# Altium PCB MainBoard.PcbDoc
Units mil, origin at the board's own origin, x right, y up, seen from the top; angles counter-clockwise.
Board outline 6790 x 4640 mil, 2 copper layers (Top Layer, Bottom Layer); 62 components, 122 nets, 447 pads, 24 vias.
Unrouted connection lines stored in the file: 85.
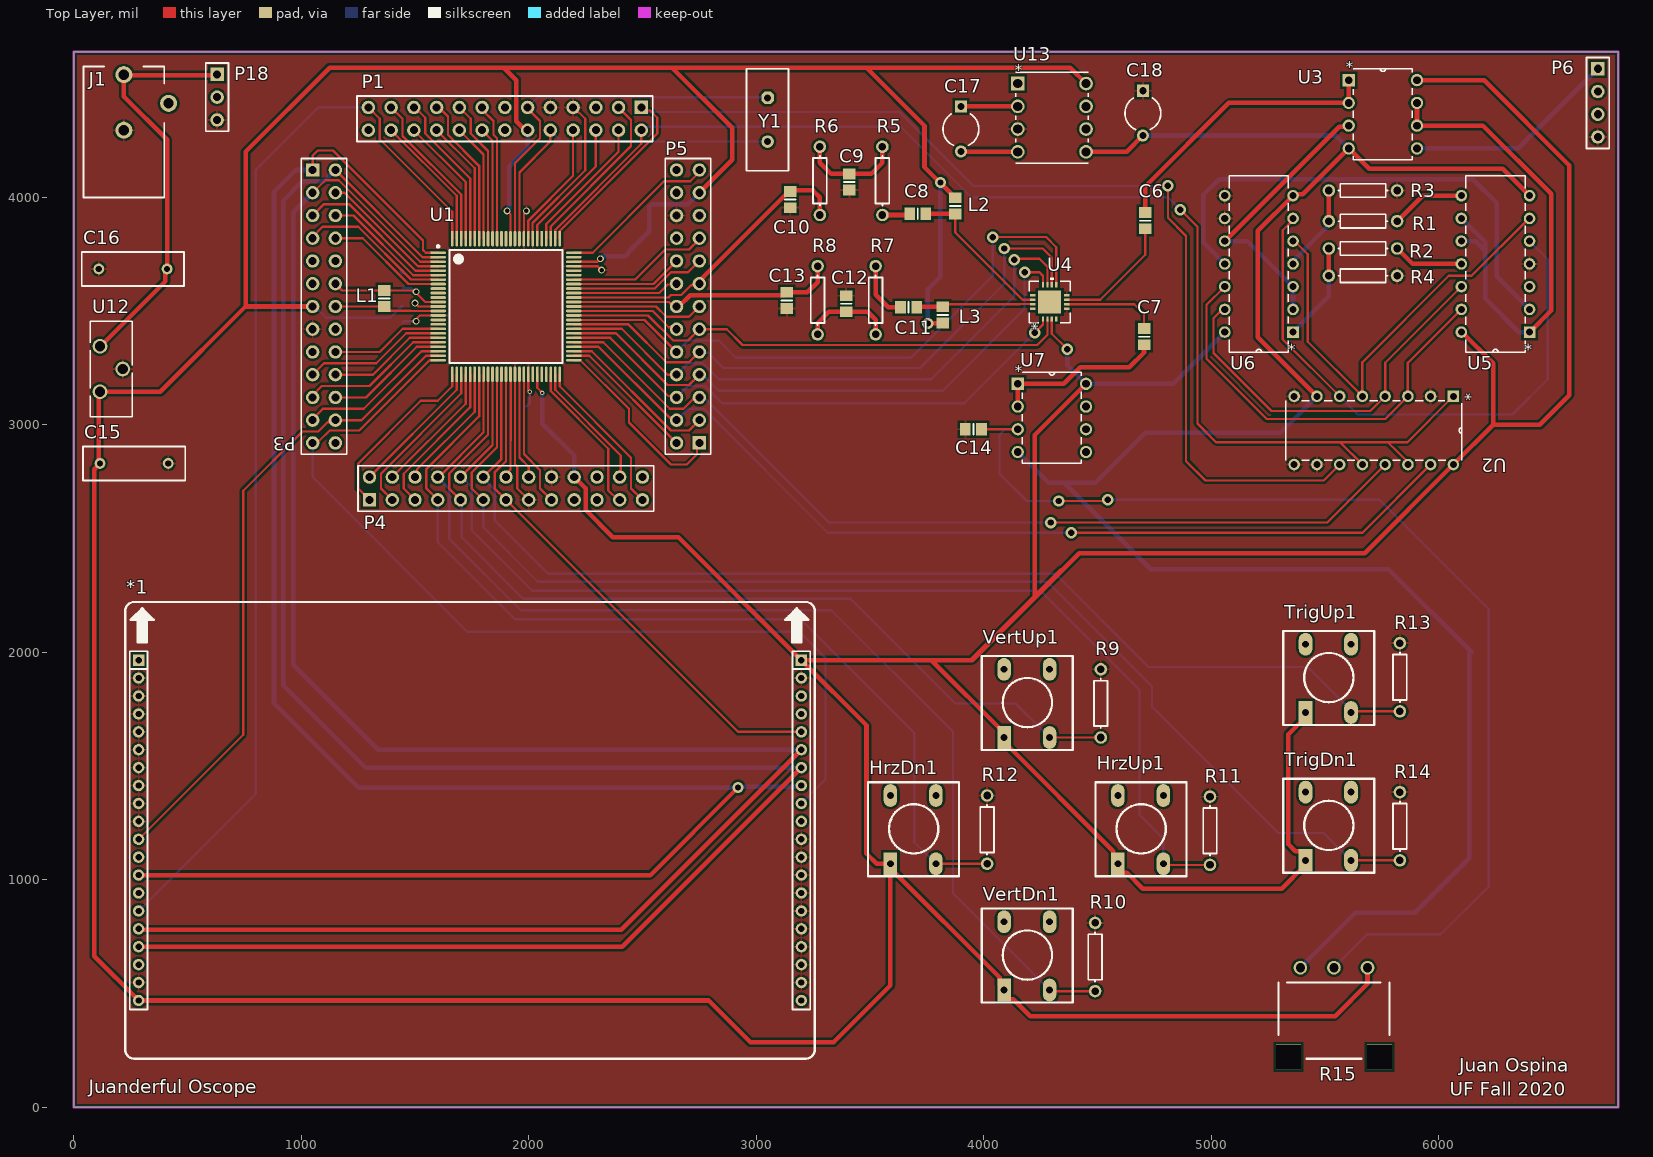
[diagram p0: Top Layer view]
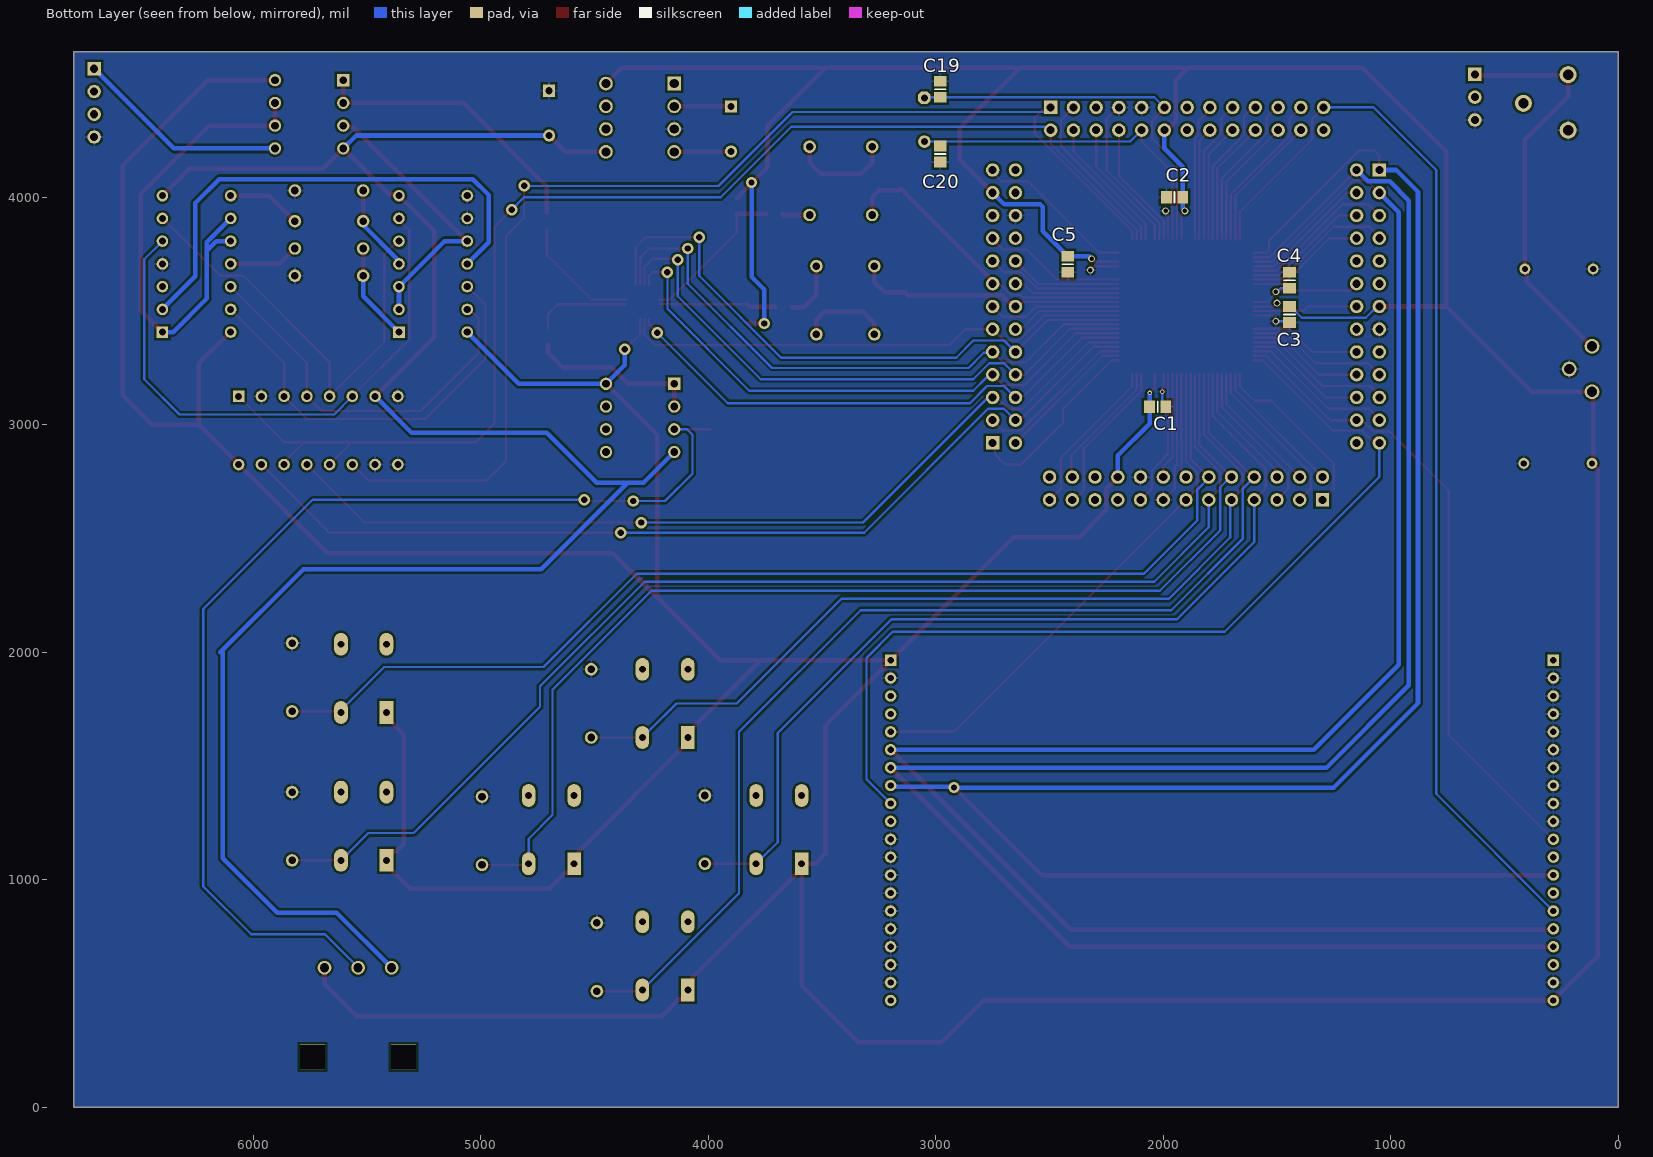
[diagram p1: Bottom Layer view, seen from below]

## Layer stack, top to bottom
Top Solder: solder mask 0.4, Solder Resist, Dk 3.5
Top Layer: signal copper 1.4
Dielectric 1: dielectric 12.6, FR-4, Dk 4.8
Bottom Layer: signal copper 1.4
Bottom Solder: solder mask 0.4, Solder Resist, Dk 3.5

## Board outline
0,0 6790,0 6790,4640 0,4640

## Design rules (kind name [scope] priority, off if disabled: settings)
Clearance Clearance_1 [InNetClass('ICNets') vs InNetClass('ICNets')] p1: gap=10 ignorepadtopadclearanceinfootprint=TRUE except(0: Arc-Hole Track-Hole SMDPad-Hole THPad-Hole Via-Hole Fill-Hole Poly-Hole Region-Hole Text-Hole; 1: Arc-Arc Arc-Track Arc-SMDPad Track-Track Track-SMDPad)
Clearance [All] p2: gap=10 ignorepadtopadclearanceinfootprint=TRUE except(0: Arc-Hole Track-Hole SMDPad-Hole THPad-Hole Via-Hole Fill-Hole Poly-Hole Region-Hole Text-Hole)
ComponentClearance [All] p1: gap=0 collisioncheckmode=3 verticalgap=10 showdistances=FALSE
PolygonConnect [All] p1: connectstyle=Relief reliefconductorwidth=10 reliefentries=4 polygonreliefangle="90 Angle" airgapwidth=10
RoomDefinition MSP432 [InComponentClass('MSP432')] p1: confinementstyle=ConfineIn formatcopy=TRUE lockcomponents=FALSE outline 775,2415 3215,2415 3215,4635 775,4635
RoutingVias RoutingVias_1 [InNetClass('ICVia')] p1: holewidth=28 width=50 viastyle="Through Hole" minholewidth=10 minwidth=20 maxholewidth=28 maxwidth=50
RoutingVias [All] p2: holewidth=28 width=50 viastyle="Through Hole" minholewidth=28 minwidth=50 maxholewidth=28 maxwidth=50
SolderMaskExpansion [All] p1: expansion=4 istentingtop=FALSE
Width Width_2 [InNetClass('SensitiveLines')] p1: maxlimit=20 minlimit=10 preferedwidth=20 minimp=50.000000 maximp=50.000000 favimp=50.000000
Width Width_1 [InNetClass('PowerNEts')] p2: maxlimit=20 minlimit=10 preferedwidth=20 minimp=50.000000 maximp=50.000000 favimp=50.000000
Width [All] p3: maxlimit=10 minlimit=10 preferedwidth=10
29 further rules are at their usual default settings.

## Classes and differential pairs
net class ICVia: AVCC1 AVSS1 VCORE
net class ICNets: 1:1_Atten_En 2:1_Atten_En 5:1_Atten_En ADC_Vref+ ADC_Vref- Atten_Latch AVCC1 AVSS1 DCOR HorzZoomDn HorzZoomUp LCD_CS LCD_RS LCD_SCK LCD_SDI LCD_SDO NetC6_2 NetC7_2 P1.0 P1.1 P1.2 P1.3 P1.4 P1.5 P1.6 P1.7 P2.0 P2.1 P2.2 P2.3 P2.4 P2.5 P2.6 P2.7 P3.1 P3.2 P3.4 P3.5 P3.6 P3.7 P4.0 P4.1 P4.2 P4.3 P4.4 P4.5 P4.6 P4.7 P5.2 P5.3 P5.4 P5.5 P5.6 P5.7 P6.4 P6.5 P6.6 P6.7 P7.0 P7.1 P7.2 P7.3 P7.4 P7.5 P7.6 P7.7 P8.0 P8.1 P8.2 P8.3 P8.4 P8.5 P8.6 P8.7 P9.0 P9.1 P9.2 P9.3 P9.4 P9.5 P9.6 P9.7 P10.5 PJ.0 PJ.1 PJ.2 PJ.3 PJ.4 PJ.5 RST_NMI_N SWCLKTCK SWDIOTMS VCORE VGA_Out+ VGA_Out- VSW
net class SensitiveLines: "1:1 Atten In" "2:1 Atten In" "2:1 Atten Out" "5:1 Atten In" "5:1 Atten Out" ADC_Vref+ ADC_Vref- "Atten In" "Atten Out" LCD_SCK LCD_SD0 LCD_SDI LCD_SDO NetC8_1 NetC9_2 NetC11_1 NetC12_2 Oscilloscope_In VGA_in+ VGA_in- VGA_Out+ VGA_Out-
net class PowerNEts: -3.3V AVCC1 NetC17_1 NetC17_2 Power_In
component class PowerCircuit: C15 C16 C17 C18 J1 P18 U12 U13
component class InterfaceBoard: *1 HrzDn1 HrzUp1 R9 R10 R11 R12 R13 R14 R15 TrigDn1 TrigUp1 VertDn1 VertUp1
component class MSP432: C1 C2 C3 C4 C5 C19 C20 L1 P1 P3 P4 P5 U1 Y1
component class FrontEndCircuit: C6 C7 C8 C9 C10 C11 C12 C13 C14 L2 L3 P6 R1 R2 R3 R4 R5 R6 R7 R8 U2 U3 U4 U5 U6 U7

## Components (designator, comment, footprint, x,y, rotation, side; value= is the part's Value field where it differs from the comment)
*1 "LCD" "LCD Footprint" 1655,1275 r0 top
C1 "Cap" 6-0805_N 2024.57,3080 r180 bottom value=4.7uF
C2 "Cap" 6-0805_N 1950,4000 r0 bottom value=4.7uF
C3 "Cap" 6-0805_N 1445,3485 r270 bottom value=4.7uF
C4 "Cap" 6-0805_N 1445,3635.43 r90 bottom value=4.7uF
C5 "Cap" 6-0805_N 2420,3705.43 r270 bottom value=4.7uF
C6 "Cap" 6-0805_N 4710,3897.25 r270 top value=100pF
C7 "Cap" 6-0805_N 4705,3387.25 r90 top value=100pF
C8 "Cap" 6-0805_N 3710.43,3927.25 r0 top value=100pF
C9 "Cap" 6-0805_N 3410,4067.25 r90 top value=100pF
C10 "Cap" 6-0805_N 3150,3990 r90 top value=100pF
C11 "Cap" 6-0805_N 3670,3517.25 r0 top value=100pF
C12 "Cap" 6-0805_N 3395,3531.82 r270 top value=100pF
C13 "Cap" 6-0805_N 3135,3546.82 r90 top value=100pF
C14 "Cap" 6-0805_N 3955,2980 r0 top value=100pF
C15 "Cap" RAD-0.3 265,2830 r0 top value=100pF
C16 "Cap" RAD-0.3 260,3685 r180 top value=100pF
C17 "Cap2" CAPR5-4X5 3900,4300 r270 top value=100pF
C18 "Cap2" CAPR5-4X5 4700,4370 r270 top value=100pF
C19 "Cap" 6-0805_N 2980,4475 r270 bottom value=4.7uF
C20 "Cap" 6-0805_N 2980,4190.43 r270 bottom value=4.7uF
HrzDn1 "SW-PB" "SW PB" 3590,1070 r90 top
HrzUp1 "SW-PB" "SW PB" 4590,1070 r90 top
J1 "PWR2.5" "Power 2.5 fixed" 45,3999.72 r90 top
L1 "Inductor" 6-0805_N 1365,3555 r270 top value=4.7uH
L2 "Inductor" 6-0805_N 3875,3962.25 r90 top value=10mH
L3 "Inductor" 6-0805_N 3820,3482.88 r270 top value=10mH
P1 "Header 13X2" HDR2X13 2495,4395 r180 top
P3 "Header 13X2" HDR2X13 1050,4120 r270 top
P4 "Header 13X2" HDR2X13 1300,2670 r0 top
P5 "Header 13X2" HDR2X13 2750,2920 r90 top
P6 "Header 4" HDR1X4 6700,4565 r270 top
P18 "Header 3" HDR1X3 630,4540 r270 top
R1 "Res1" AXIAL-0.3 5667.75,3895 r180 top value=20K
R2 "Res1" AXIAL-0.3 5667.75,3775 r180 top value=10K
R3 "Res1" AXIAL-0.3 5667.75,4030 r180 top value=5K
R4 "Res1" AXIAL-0.3 5667.75,3655 r180 top value=10K
R5 "Res1" AXIAL-0.3 3555,4072.25 r90 top value=1K
R6 "Res1" AXIAL-0.3 3280,4072.25 r270 top value=1K
R7 "Res1" AXIAL-0.3 3525,3547.25 r270 top value=1K
R8 "Res1" AXIAL-0.3 3270,3547.25 r90 top value=1K
R9 "Res1" AXIAL-0.3 4515,1775 r90 top value=1K
R10 "Res1" AXIAL-0.3 4490,660 r90 top value=1K
R11 "Res1" AXIAL-0.3 4995,1215 r90 top value=1K
R12 "Res1" AXIAL-0.3 4015,1220 r90 top value=1K
R13 "Res1" AXIAL-0.3 5830,1890 r90 top value=1K
R14 "Res1" AXIAL-0.3 5830,1235 r90 top value=1K
R15 "RPot_3" BigPot 5540,613 r180 top value=10K
TrigDn1 "SW-PB" "SW PB" 5415,1085 r90 top
TrigUp1 "SW-PB" "SW PB" 5415,1735 r90 top
U1 "MSP432P401RIPZ" PZ0100A_N 1900,3520 r0 top value=Value
U2 "CD4054BE" N16 5365,2825 r270 top
U3 "LM358AP" P8 5905,4215 r0 top
U4 "LMH6515SQ/NOPB" SQA16A 4290,3540 r90 top
U5 "CD4066BE" N14 6100,4007.25 r180 top
U6 "CD4066BE" N14 5060,4007.25 r180 top
U7 "LM358AP" P8 4450,2880 r0 top
U12 "TLV2217-33KCSE3" KCS3 215,3345 r90 top
U13 "icl7660epa+" 21-0043D_8_MXM 4150,4500 r0 top
VertDn1 "SW-PB" "SW PB" 4090,515 r90 top
VertUp1 "SW-PB" "SW PB" 4090,1625 r90 top
Y1 "XTAL" HC-49U 3050,4341.06 r270 top

## Footprints (in the part's own frame and the unit in brackets; to place one, negate y for a bottom-side part, rotate by r counter-clockwise, add the part's x,y. Pads: shape width x height; smd on the part's side, far side on the other; paste and mask are expansions set on the pad)
6-0805_N [mm] "Chip Resistor, Body 2.0x1.2mm, IPC Medium Density"
  rect 1.2x1.4 smd: 1(-0.9,0) 2(0.9,0)
  silkscreen extent 0,-0.6 0,0.6, body extent -1.07,-0.7 1.07,0.7, height 0.7
21-0043D_8_MXM [mil]
  rect 60x60 hole 40 mask+0: 1(0,0)
  round 60 hole 40 mask+0: 2(0,-100) 3(0,-200) 4(0,-300) 5(300,-300) 6(300,-200) 7(300,-100) 8(300,0)
  silkscreen extent -10,-350 310,50, body extent 0,0 10,10, height 10
AXIAL-0.3 [mm] "Axial Device, Thru-Hole; 2 Leads; 0.3 in Pin Spacing"
  round 1.4 hole 0.85: 1(-3.81,0) 2(3.81,0)
  silkscreen extent -2.77,-0.76 2.77,0.76
BigPot [mil]
  round 60 hole 40: 1(147.5,0) 2(0,0) 3(-147.5,0)
  rect 110x110 hole 106 square: ""(-200,393) ""(200,393)
  silkscreen extent -244,65 244,400
CAPR5-4X5 [mm] "Capacitor; 2 Leads"
  rect 1.35x1.35 hole 0.8: 1(-2.5,0)
  round 1.35 hole 0.8: 2(2.5,0)
  silkscreen extent -1.69,-2 1.82,2
HC-49U [mm]
  oct 1.4x1.4 hole 0.8: 1(-2.44,0)
  round 1.4 hole 0.8: 2(2.44,0)
  silkscreen extent -5.7,-2.35 5.7,2.35
HDR1X3 [mm] "Connector; Header; 3 Position"
  rect 1.5x1.5 hole 0.9: 1(0,0)
  round 1.5 hole 0.9: 2(2.54,0) 3(5.08,0)
  silkscreen extent -1.27,-1.27 6.35,1.27
HDR1X4 [mm] "Connector; Header; 4 Position"
  rect 1.5x1.5 hole 0.9: 1(0,0)
  round 1.5 hole 0.9: 2(2.54,0) 3(5.08,0) 4(7.62,0)
  silkscreen extent -1.27,-1.27 8.89,1.27
HDR2X13 [mm] "Connector; Header; 13x2 Position"
  rect 1.5x1.5 hole 0.9: 1(0,0)
  round 1.5 hole 0.9: 2(0,2.54) 3(2.54,0) 4(2.54,2.54) 5(5.08,0) 6(5.08,2.54) 7(7.62,0) 8(7.62,2.54) 9(10.16,0) 10(10.16,2.54) 11(12.7,0) 12(12.7,2.54) 13(15.24,0) 14(15.24,2.54) 15(17.78,0) 16(17.78,2.54) 17(20.32,0) 18(20.32,2.54) 19(22.86,0) 20(22.86,2.54) 21(25.4,0) 22(25.4,2.54) 23(27.94,0) 24(27.94,2.54) 25(30.48,0) 26(30.48,2.54)
  silkscreen extent -1.27,-1.27 31.75,3.81
KCS3 [mil]
  round 65 hole 45: 1(-200,100) 2(-100,0) 3(0,100)
  silkscreen extent -310,-43 110,142, body extent 0,0 10,10, height 10
"LCD Footprint" [mm]
  rect 1.27x1.27 hole 0.7: 1(-34.798,17.526) 21(39.202,17.526)
  round 1.27 hole 0.7: 2(-34.798,15.526) 3(-34.798,13.526) 4(-34.798,11.526) 5(-34.798,9.526) 6(-34.798,7.526) 7(-34.798,5.526) 8(-34.798,3.526) 9(-34.798,1.526) 10(-34.798,-0.474) 11(-34.798,-2.474) 12(-34.798,-4.474) 13(-34.798,-6.474) 14(-34.798,-8.474) 15(-34.798,-10.474) 16(-34.798,-12.474) 17(-34.798,-14.474) 18(-34.798,-16.474) 19(-34.798,-18.474) 20(-34.798,-20.474) 22(39.202,15.526) 23(39.202,13.526) 24(39.202,11.526) 25(39.202,9.526) 26(39.202,7.526) 27(39.202,5.526) 28(39.202,3.526) 29(39.202,1.526) 30(39.202,-0.474) 31(39.202,-2.474) 32(39.202,-4.474) 33(39.202,-6.474) 34(39.202,-8.474) 35(39.202,-10.474) 36(39.202,-12.474) 37(39.202,-14.474) 38(39.202,-16.474) 39(39.202,-18.474) 40(39.202,-20.474)
  silkscreen extent -36.3,-26.97 40.7,24.03
N14 [mil]
  rect 51x51 hole 31: 1(-300,600)
  round 51 hole 31: 2(-300,500) 3(-300,400) 4(-300,300) 5(-300,200) 6(-300,100) 7(-300,0) 8(0,0) 9(0,100) 10(0,200) 11(0,300) 12(0,400) 13(0,500) 14(0,600)
  silkscreen extent -280,-88 -20,688, body extent 0,0 10,10, height 10
N16 [mil]
  rect 51x51 hole 31: 1(-300,700)
  round 51 hole 31: 2(-300,600) 3(-300,500) 4(-300,400) 5(-300,300) 6(-300,200) 7(-300,100) 8(-300,0) 9(0,0) 10(0,100) 11(0,200) 12(0,300) 13(0,400) 14(0,500) 15(0,600) 16(0,700)
  silkscreen extent -280,-38 -20,738, body extent 0,0 10,10, height 10
P8 [mil]
  rect 54x54 hole 34: 1(-300,300)
  round 54 hole 34: 2(-300,200) 3(-300,100) 4(-300,0) 5(0,0) 6(0,100) 7(0,200) 8(0,300)
  silkscreen extent -280,-50 -20,350, body extent 0,0 10,10, height 10
"Power 2.5 fixed" [mm]
  round 1.905 hole 1.143: 1(13.7,-4.445) 2(7.5,-4.445) 3(10.5,-9.445)
  silkscreen extent 0,-8.95 14.6,0.06
PZ0100A_N [mm]
  oval 1.75x0.3 smd paste+0 mask+0.051: 1(-7.575,6) 2(-7.575,5.5) 3(-7.575,5) 4(-7.575,4.5) 5(-7.575,4) 6(-7.575,3.5) 7(-7.575,3) 8(-7.575,2.5) 9(-7.575,2) 10(-7.575,1.5) 11(-7.575,1) 12(-7.575,0.5) 13(-7.575,0) 14(-7.575,-0.5) 15(-7.575,-1) 16(-7.575,-1.5) 17(-7.575,-2) 18(-7.575,-2.5) 19(-7.575,-3) 20(-7.575,-3.5) 21(-7.575,-4) 22(-7.575,-4.5) 23(-7.575,-5) 24(-7.575,-5.5) 25(-7.575,-6) 51(7.575,-6) 52(7.575,-5.5) 53(7.575,-5) 54(7.575,-4.5) 55(7.575,-4) 56(7.575,-3.5) 57(7.575,-3) 58(7.575,-2.5) 59(7.575,-2) 60(7.575,-1.5) 61(7.575,-1) 62(7.575,-0.5) 63(7.575,0) 64(7.575,0.5) 65(7.575,1) 66(7.575,1.5) 67(7.575,2) 68(7.575,2.5) 69(7.575,3) 70(7.575,3.5) 71(7.575,4) 72(7.575,4.5) 73(7.575,5) 74(7.575,5.5) 75(7.575,6)
  oval 0.3x1.75 smd paste+0 mask+0.051: 26(-6,-7.575) 27(-5.5,-7.575) 28(-5,-7.575) 29(-4.5,-7.575) 30(-4,-7.575) 31(-3.5,-7.575) 32(-3,-7.575) 33(-2.5,-7.575) 34(-2,-7.575) 35(-1.5,-7.575) 36(-1,-7.575) 37(-0.5,-7.575) 38(0,-7.575) 39(0.5,-7.575) 40(1,-7.575) 41(1.5,-7.575) 42(2,-7.575) 43(2.5,-7.575) 44(3,-7.575) 45(3.5,-7.575) 46(4,-7.575) 47(4.5,-7.575) 48(5,-7.575) 49(5.5,-7.575) 50(6,-7.575) 76(6,7.575) 77(5.5,7.575) 78(5,7.575) 79(4.5,7.575) 80(4,7.575) 81(3.5,7.575) 82(3,7.575) 83(2.5,7.575) 84(2,7.575) 85(1.5,7.575) 86(1,7.575) 87(0.5,7.575) 88(0,7.575) 89(-0.5,7.575) 90(-1,7.575) 91(-1.5,7.575) 92(-2,7.575) 93(-2.5,7.575) 94(-3,7.575) 95(-3.5,7.575) 96(-4,7.575) 97(-4.5,7.575) 98(-5,7.575) 99(-5.5,7.575) 100(-6,7.575)
  silkscreen extent -7.7,-6.3 6.3,6.82, body extent 0,0 0.25,0.25, height 0.25
RAD-0.3 [mm] "Radial Cap, Thru-Hole; 2 Leads; 0.3 in Pin Spacing"
  round 1.2 hole 0.7: 1(-3.81,0) 2(3.81,0)
  silkscreen extent -5.71,-1.91 5.71,1.91
SQA16A [mil]
  rect 24x10 smd paste-5: 1(-75,29.53) 2(-75,9.84) 3(-75,-9.84) 4(-75,-29.53) 9(75,-29.53) 10(75,-9.84) 11(75,9.84) 12(75,29.53)
  rect 10x24 smd paste-5: 5(-29.53,-75) 6(-9.84,-75) 7(9.84,-75) 8(29.53,-75) 13(29.53,75) 14(9.84,75) 15(-9.84,75) 16(-29.53,75)
  rect 102x102 smd paste-51: 17(0,0)
  silkscreen extent -90,-90 107,90, body extent 0,0 10,10, height 10
"SW PB" [mil]
  rect 100x60 hole 30: 1(0,0)
  oval 100x60 hole 30: 2(0,-200) 3(300,-200) 4(300,0)
  silkscreen extent -55,-302 358,98

## Part data
C1 C2 C3 C4 C5 C6 C7 C8 C9 C10 C11 C12 C13 C14 C15 C16 C17 C18 C19 C20: "Capacitor", Publisher="Altium Limited"
  C1 C2 C3 C4 C5 C6 C7 C8 C9 C10 C11 C12 C13 C14 C15 C16 C19 C20: LatestRevisionDate=17-Jul-2002, LatestRevisionNote="Re-released for DXP Platform.", PackageDescription="Radial Cap, Thru-Hole; 2 Leads; 0.3 in Pin Spacing", PackageReference=RAD-0.3, Published=8-Jun-2000
  C17 C18: PackageDescription="Capacitor; 2 Leads", PackageReference=CAPR5-4X5, Published=23-Sep-2002
HrzDn1 HrzUp1 TrigDn1 TrigUp1 VertDn1 VertUp1: "DIGIKEY SW400-ND", LatestRevisionDate=17-Jul-2002, LatestRevisionNote="Re-released for DXP Platform.", Published=24-Mar-1999, Publisher="Altium Limited"
J1: "Low Voltage Power Supply Connector", ComponentLink1Description="Manufacturer Link", ComponentLink1URL=http://domino.kycon.com/internet/Products.html, DatasheetDocument=09-May-2002, Published=17-Dec-2003, Publisher="Altium Limited"
P1 P3 P4 P5: "Header, 13-Pin, Dual row", LatestRevisionDate=17-Jul-2002, LatestRevisionNote="Re-released for DXP Platform.", Publisher="Altium Limited"
P6: "Header, 4-Pin", LatestRevisionDate=17-Jul-2002, LatestRevisionNote="Re-released for DXP Platform.", Publisher="Altium Limited"
P18: "Header, 3-Pin", LatestRevisionDate=17-Jul-2002, LatestRevisionNote="Re-released for DXP Platform.", Publisher="Altium Limited"
R1 R2 R3 R4 R5 R6 R7 R8 R9 R10 R11 R12 R13 R14: "Resistor", LatestRevisionDate=17-Jul-2002, LatestRevisionNote="Re-released for DXP Platform.", PackageDescription="Axial Device, Thru-Hole; 2 Leads; 0.3 in Pin Spacing", PackageReference=AXIAL-0.3, Published=8-Jun-2000, Publisher="Altium Limited"
R15: library part RPot, "Potentiometer", LatestRevisionDate=17-Jul-2002, LatestRevisionNote="Re-released for DXP Platform.", Published=8-Jun-2000, Publisher="Altium Limited", Set Position=0.5, Sim Note="Enter the Resistance value and the set point into parameter fields."
U1: "No Description Available", Manufacturer="Texas Instruments", PartNumber=XMS432P401RIPZR, CompType=IC, Copyright="Copyright (C) 2018 Accelerated Designs. All rights reserved", MountType=SMT, PackageReference=PZ0100A, PIN_COUNT=100, RefDes=RefDes, TYPE=DEV
U2: "CMOS 4-Segment Liquid-Crystal Display Driver", Manufacturer="Texas Instruments", PACKAGE_DESIGNATOR=N, Copyright="Copyright (C) 2018 Accelerated Designs. All rights reserved", Datasheet_URL=http://www.ti.com/lit/gpn/CD4054B, FAMILY_NAME="NON-INVERTING BUFFER/DRIVER", GENERIC_PART_NUMBER=CD4054B, INDUSTRY_STD_PKG_TYPE=PDIP, PIN_COUNT=16, RefDes=RefDes, TYPE=DEV
U3 U7: "Dual Operational Amplifier", Manufacturer="Texas Instruments", PACKAGE_DESIGNATOR=P, Copyright="Copyright (C) 2018 Accelerated Designs. All rights reserved", Datasheet_URL=http://www.ti.com/lit/gpn/LM358A, FAMILY_NAME="STANDARD LINEAR AMPLIFIER", GENERIC_PART_NUMBER=LM358A, INDUSTRY_STD_PKG_TYPE=PDIP, Manufacturer_Part_Number=LM358AP, PIN_COUNT=8, RefDes=RefDes, TYPE=DEV, Vendor="Texas Instruments"
U4 U13: "No Description Available", Copyright="Copyright (C) 2018 Accelerated Designs. All rights reserved", RefDes=RefDes, TYPE=DEV
  U13: Built_By=EMA_UL_Team, Manufacturer_Part_Number=icl7660epa+, SourceLibrary=Maxim_2014-06-20, Vendor="Maxim Integrated Products"
U5 U6: "CMOS Quad Bilateral Switch", Manufacturer="Texas Instruments", PACKAGE_DESIGNATOR=N, Copyright="Copyright (C) 2018 Accelerated Designs. All rights reserved", Datasheet_URL=http://www.ti.com/lit/gpn/CD4066B, FAMILY_NAME="ANALOG SWITCH/MULTIPLEXER (greater than 5V)", GENERIC_PART_NUMBER=CD4066B, INDUSTRY_STD_PKG_TYPE=PDIP, PIN_COUNT=14, RefDes=RefDes, TYPE=DEV
U12: "Single Output LDO, 500mA, Fixed(1.8V), Output Accuracy of 2%, Thermal Overload Protection", Manufacturer="Texas Instruments", PACKAGE_DESIGNATOR=KCS, Copyright="Copyright (C) 2018 Accelerated Designs. All rights reserved", Datasheet_URL=http://www.ti.com/lit/gpn/TLV2217-18, FAMILY_NAME="SINGLE CHANNEL LDO", GENERIC_PART_NUMBER=TLV2217-18, INDUSTRY_STD_PKG_TYPE=TO-220, Manufacturer_Part_Number=TLV2217-33KCSE3, PIN_COUNT=3, RefDes=RefDes, TYPE=DEV, Vendor="Texas Instruments"
Y1: "Crystal Oscillator", LatestRevisionDate=17-Jul-2002, LatestRevisionNote="Re-released for DXP Platform.", PackageDescription="Crystal, Thru-Hole; 2 Leads; Body 3.1 x 8.2 mm (Dia.xH)", PackageReference=R38, Published=8-Jun-2000, Publisher="Altium Limited"
L1 L2 L3: Code_IEC=1005, Code_JEITA=0402, LatestRevisionDate=29-May-2009, LatestRevisionNote="IPC-7351 Footprint Added.", PackageDescription="Chip Inductor", PackageReference=0402-A, Published=8-Jun-2000, Publisher="Altium Limited"

## Via types
v1: diameter 50, hole 28, Top Layer to Bottom Layer, 15 vias
v2: diameter 30, hole 20, Top Layer to Bottom Layer, 7 vias
v3: diameter 20, hole 10, Top Layer to Bottom Layer, 2 vias

## Nets (pads, with @x,y where several pads share a name; then routed paths per layer and width w, separated by ;. In a path a pad name is that pad's centre, name@x,y a point inside that pad or via, vN(x,y) a via of type N, cw(c..) or ccw(c..) an arc to the next point about the centre after c; other vN are vias at no path point)
"1:1 Atten In": U5.2 U6.11 | length 2232.4
  Bottom Layer w20: U6.11 4965,3802.25 4965,4010 5035,4080 6150,4080 6255,3975 6255,3652.25 U5.2
"1:1 Enable": U2.3 U5.13 U6.12 | length 1866.2
  Top Layer w10: U6.12 4980,3527.25 4980,3290 5245,3025 5765,3025 U2.3 5865,3272.25 U5.13
1:1_Atten_En: P5.4 U1.54 U2.15 | length 4280.4
  Top Layer w10: U1.54 2307.17,3342.83 2620.61,3029.39 2640.61,3029.39 P5.4 P5.4@2656.49,3026.49 ; v1(4385,2525) 5665,2525 U2.15
  Bottom Layer w10: P5.4 2700,3070 2770,3070 3315,2525 v1(4385,2525)
"2:1 Atten In": R2.1 U5.11 | length 310.3
  Top Layer w20: R2.1 5885.5,3707.25 U5.11
"2:1 Atten Out": R2.2 R4.2 U6.1 | length 433.1
  Top Layer w20: R4.2 R2.2
  Bottom Layer w20: U6.1 5517.75,3565 R4.2
"2:1 Enable": U2.4 U5.12 U6.13 | length 1728
  Top Layer w10: U6.13 5048.91,3507.25 5010,3468.34 5010,3315 5265,3060 5700,3060 U2.4 5765,3272.25 U5.12
2:1_Atten_En: P5.5 U1.55 U2.13 | length 4047.3
  Top Layer w10: U1.55 2327.48,3362.52 2620,3070 2680,3070 2720.61,3110.61 2740.61,3110.61 P5.5 P5.5@2753.67,3116.33 ; v1(4295,2570) 5510,2570 U2.13
  Bottom Layer w10: P5.5 2759.39,3110.61 2779.39,3110.61 3320,2570 v1(4295,2570)
"5:1 Atten In": R1.1 U5.8 | length 328.7
  Top Layer w20: R1.1 5930,4007.25 U5.8
"5:1 Atten Out": R1.2 R3.2 U6.4 | length 388.1
  Top Layer w20: R1.2 R3.2
  Bottom Layer w10: U6.4 5360,3718.34 5372.26,3730.61 5372.26,3732.26 ; R1.2@5509.12,3869.12 5509.12,3886.37 R1.2
  Bottom Layer w20: 5372.26,3732.26 R1.2@5509.12,3869.12
"5:1 Enable": U2.5 U5.6 U6.5 | length 1960
  Top Layer w10: U6.5 5367.75,3807.25 5425,3750 5425,3365 U2.5 5665,3275 6045,3655 6145,3655 6397.25,3907.25 U5.6
5:1_Atten_En: P1.1 U1.76 U2.11 | length 5238.3
  Top Layer w10: U1.76 2136.57,3818.57 2136.57,3851.57 2565,4280 2565,4350 2533.67,4381.33 2508.67,4381.33 P1.1 ; v1(4810,4050) 4810,3910 4890,3830 4890,2840 4975,2755 5495,2755 U2.11
  Bottom Layer w10: P1.1 2515,4375 3630,4375 3955,4050 v1(4810,4050)
+5: 
-3.3V: C18.2 R15.1 U2.7 U3.4 U5.7 U6.7 U7.4 U13.5 | length 8948.4
  Top Layer w20: U13.5 4628.43,4200 C18.2 ; U2.7 5205,3385 5205,3852.25 U6.7 5365.93,4013.18 5403.18,4013.18 U3.4 5695,4125 6282.25,4125 U5.7
  Bottom Layer w20: U7.4 4285,2745 4355,2745 ; C18.2 5548.43,4271.57 U3.4 ; R15.1 5634.5,855 5895,855 6135,1095 6135,2000 ; U2.7 5305,2965 4710,2965 4490,2745 4355,2745 ; 6145,2000 5780,2365 4735,2365 4355,2745
-5: 
ADC_Vref+: C10.2 P5.15 R6.2 U1.65 | length 1381.8
  Top Layer w10: U1.65 2614.37,3559.37 2625,3570 2670,3570 2713.51,3613.51 2743.51,3613.51 P5.15
  Top Layer w20: P5.15 2750,3630.57 2766.18,3646.75 2766.18,3648 3137.44,4019.26 3137.44,4023.19 3151.06,4036.82 3155,4036.82 3161.82,4030 3250,4030 3280,4000 R6.2
ADC_Vref-: C13.2 P5.14 R8.2 U1.64 | length 1194.3
  Top Layer w10: U1.64 2617.04,3539.69 2636.73,3520 P5.14
  Top Layer w20: P5.14 2660,3520 2710,3570 3122.75,3570 C13.2 3225,3582.25 3270,3627.25 R8.2
"Atten In": U3.6 U3.7 U5.1 U5.9 U5.10 | length 2235.8
  Top Layer w20: U3.7 U3.6 6195,4315 6495,4015 6495,3502.25 U5.1
  Bottom Layer w20: U5.10 6162.75,3807.25 6205,3765 ; U5.9 6205,3802.25 6205,3765 ; U5.1 6352.75,3407.25 6205,3555 6205,3765
"Atten Out": U3.3 U6.2 U6.3 U6.10 | length 1238.2
  Top Layer w10: U3.3@5600.25,4310.25 U3.3
  Top Layer w20: U6.10 5563,4310.25 U3.3@5600.25,4310.25
  Bottom Layer w20: U6.10 5160,3807.25 U6.3 U6.2
Atten_Latch: P1.2 U1.77 U2.1 U2.12 U2.14 | length 5654.7
  Top Layer w10: U1.77 2116.54,3856.54 2495,4235 P1.2 ; v1(4865,3945) 4940,3870 4940,3005 5021.5,2923.5 5569,2923.5 ; U2.12 5569,2921 5569,2923.5 ; U2.14 5865,2835 5820,2880 5776.5,2923.5 ; U2.1 5863.5,2923.5 5776.5,2923.5 ; 5569,2923.5 5776.5,2923.5
  Bottom Layer w10: P1.2 2508.27,4295 2523.27,4310 3635,4310 3945,4000 4810,4000 v1@4870,3940
AVCC1: *1.20 *1.21 C1.1 C2.1 C3.1 C5.1 C15.1 HrzDn1.1 HrzUp1.1 L2.2 L3.2 P1.12 P3.13 P4.20 P5.23 R15.3 TrigDn1.1 TrigUp1.1 U1.13 U1.45 U1.73 U1.87 U2.16 U3.8 U4.3 U5.14 U6.14 U7.8 U12.1 U13.8 VertDn1.1 VertUp1.1 | length 33964.9
  Top Layer w10: v2(1500,3535) 1515,3520 U1.13 ; v2(1905,3940) 1919.69,3925.31 U1.87 ; U1.45 2037.8,3162.2 v3(2060,3140) ; U1.73 2301.85,3716.85 v2(2315,3730) v2@2320,3735 ; U4.3@4299.53,3465 4299.53,3445.47 4299.84,3445.16 4299.84,3400.16 v1(4367.5,3332.5)
  Top Layer w20: P3.13 755,3520 ; P1.12 1985,4295 1945,4335 1945,4515 1890,4570 ; P4.20 2250,2720 2250,2625 2370,2505 2658.39,2505 *1.21 ; P5.23 2895,4165 2895,4305 2630,4570 ; v1(3755,3445) 3756.22,3446.22 3818.78,3446.22 L3.2 ; L2.2 3871.06,3997.68 3857.44,4011.31 3857.44,4015.24 3740,4132.68 3740,4315 3485,4570 ; 3940,1965 3770,1965 ; 3945,1965 4225,2245 ; 3950,1965 4420,2435 5675,2435 U2.16 6240,3000 ; 4340.57,2360.57 4225,2245 ; U7.8 4225,2955 4225,2245 ; U13.8 4380,4570 3485,4570 ; TrigUp1.1 5415,1715 5340,1640 5340,1155 5370,1125 5395,1125 5415,1105 TrigDn1.1 5415,1065 5310,960 4700,960 4630,1030 4610,1030 4590,1050 HrzUp1.1 4570,1090 4570,1125 4090,1605 VertUp1.1 4090,1645 3770,1965 ; R15.3 5687.5,542.5 5545,400 4205,400 4130,475 4110,475 4090,495 VertDn1.1 4070,535 4070,570 HrzDn1.1@3590,1050 ; U3.8 6200,4515 6575,4140 6575,3130 6445,3000 6240,3000 ; U5.14 6102.75,3407.25 6240,3270 6240,3000 ; 755,3520 380,3145 U12.1 110,3140 110,2835 C15.1 115,2829.66 90,2804.66 90,663.94 *1.20 2791.06,468.94 2975,285 3340,285 3590,535 HrzDn1.1@3590,1050 ; 755,3520 755,4200 1125,4570 1890,4570 ; 1890,4570 2630,4570 ; 2630,4570 3485,4570 ; *1.21 3485,1678.39 3485,1115 3530,1070 HrzDn1.1 HrzDn1.1@3590,1050 ; *1.21 3770,1965
  Bottom Layer w10: P3.13 1060,3520 1110,3470 1390.63,3470 1441.06,3520.43 C3.1
  Bottom Layer w20: v2@1499.06,3534.06 v2(1500,3535) ; v2(1905,3940) 1914.57,3949.57 C2.1 1914.57,4134.57 1995,4215 P1.12 P1.12@1992.5,4292.5 ; v3(2060,3140) C1.1 2060,3005 2200,2865 P4.20 ; v2@2320,3735 2325.87,3740.87 C5.1 2423.94,3740.87 2437.56,3754.49 2437.56,3758.43 2530,3850.87 2530,3958.28 2541.72,3970 2700,3970 P5.23 ; v1(3755,3445) 3755,3595 3810,3650 v1(3810,4065) ; v1(4367.5,3332.5) 4367.5,3262.5 U7.8 4832.75,3180 U6.14
AVSS1: *1.2 *1.3 *1.4 *1.5 *1.6 *1.7 *1.8 *1.9 *1.10 *1.19 *1.22 *1.31 *1.32 *1.33 *1.34 *1.35 *1.36 *1.37 *1.38 *1.39 C1.2 C2.2 C3.2 C4.2 C5.2 C9.1 C10.1 C12.1 C13.1 C14.1 C15.2 C16.2 C18.1 C19.1 C20.2 J1.2 P1.7 P1.9 P3.15 P4.15 P4.18 P5.22 P6.4 P18.3 R3.1 R4.1 R9.2 R10.2 R11.2 R12.2 R13.2 R14.2 U1.15 U1.40 U1.43 U1.72 U1.82 U1.84 U2.2 U2.8 U2.9 U2.10 U4.5 U4.8 U4.17 U5.4 U6.8 U6.9 U12.2 U13.3 | length 1862.2
  Top Layer w10: v2(1505,3455) 1505,3465 1520.63,3480.63 U1.15 ; U1.40 1939.72,3221.43 1939.72,3191.6 1940,3191.32 1940,2825 1950,2815 1950,2720 P4.15 ; U1.84 1978.74,3928.74 v2(1990,3940) ; U1.43 1998.43,3151.57 v3(2005,3145) ; U1.82 2018.11,3847.26 2016.52,3848.85 2016.52,3886.52 2248.41,4118.41 2248.41,4344.98 2198.39,4395 P1.7 ; U1.72 2302.83,3697.17 v2(2320,3680)
  Bottom Layer w10: C3.2 1450.43,3455 v2(1505,3455) ; C1.2 2005,3095.87 v3(2005,3145)
  Bottom Layer w20: C4.2@1440.87,3675 C4.2
DCOR: P4.19 U1.44
HorzZoomDn: HrzDn1.2 P4.7 R12.1 U1.32 | length 4139.6
  Top Layer w10: P4.7 1550,2720 1550,2805 1781.89,3036.89 U1.32 ; HrzDn1.2 R12.1
  Bottom Layer w10: P4.7 1600,2485 1940,2145 3195,2145 3695,1645 3695,1165 3760.43,1099.57 3766.9,1099.57 3790,1076.47 HrzDn1.2
HorzZoomUp: HrzUp1.2 P4.10 R11.1 U1.35 | length 5009.3
  Top Layer w10: P4.10 1840.94,2910.94 U1.35 ; HrzUp1.2 4795,1065 R11.1
  Bottom Layer w10: P4.10 1705,2770 1750,2725 1750,2535 2015,2270 4250,2270 4685,1835 4685,1285 4790,1180 HrzUp1.2
LCD_CS: *1.11 P3.24 U1.24 | length 2825.5
  Top Layer w10: *1.11 745,1637.6 745,2710 1005,2970 1075,2970 1115.61,3010.61 1140.61,3010.61 P3.24 1265,3020 1548.46,3303.46 U1.24
LCD_RS: *1.15 P1.25 U1.100 | length 4809.8
  Top Layer w10: P1.25 1345,4345 1345,4255 1663.78,3936.22 U1.100
  Bottom Layer w10: *1.15 800,1377.64 800,4120 1075.86,4395.86 1294.14,4395.86 P1.25
LCD_SCK: *1.13 *1.28 P3.1 U1.1 | length 8564
  Top Layer w10: P3.1 1050,4183.28 1072.19,4205.47 1139.53,4205.47 1535,3810 1535,3767.94 1546.72,3756.22 U1.1
  Top Layer w20: *1.13 2535.12,1020.12 v1(2920,1405)
  Bottom Layer w10: v1(2920,1405) v1@2924.41,1409.41 ; *1.28@3193.98,1409.41 *1.28
  Bottom Layer w20: P3.1 975,4120 880,4025 880,1775 1250,1405 v1(2920,1405) ; v1@2924.41,1409.41 *1.28@3193.98,1409.41
LCD_SD0: 
LCD_SDI: *1.17 *1.27 P3.2 U1.2 | length 8694.6
  Top Layer w10: P3.2 1533.46,3736.54 U1.2
  Top Layer w20: *1.17 2410.98,705.16 *1.27
  Bottom Layer w20: P3.2 1100,4070 1005,4070 920,3985 920,1855 1282.44,1492.56 *1.27
LCD_SDO: *1.16 *1.26 P3.3 U1.3 | length 8464.1
  Top Layer w10: P3.3 1105,4075 1165,4075 1523.15,3716.85 U1.3
  Top Layer w20: *1.16 288.9,780 2407.09,780 *1.26
  Bottom Layer w20: P3.3 965,3935 965,1945 1338.7,1571.3 *1.26
NetC6_2: C6.2 U4.7 | length 541.3
  Top Layer w10: U4.7 4512.59,3549.84 4710,3747.25 C6.2
NetC7_2: C7.2 U4.6 | length 422.3
  Top Layer w10: U4.6 4662.09,3530.16 4705,3487.25 C7.2
NetC8_1: C8.1 R5.1 | length 122.1
  Top Layer w20: R5.1 3670,3922.25 C8.1
NetC9_2: C9.2 R5.2 R6.1 | length 456.1
  Top Layer w20: R6.1 3280,4152.25 3329.57,4102.68 C9.2 3505.43,4102.68 3555,4152.25 R5.2
NetC11_1: C11.1 R7.1 | length 257.3
  Top Layer w20: R7.1 3525,3572.25 3580,3517.25 C11.1
NetC12_2: C12.2 R7.2 R8.1 | length 404.5
  Top Layer w20: R8.1 3270,3447.25 3319.13,3496.38 C12.2 3490.87,3496.38 3525,3462.25 R7.2
NetC17_1: C17.1 U13.2 | length 251.6
  Top Layer w20: C17.1 3900,4400 U13.2
NetC17_2: C17.2 U13.4 | length 250.7
  Top Layer w20: C17.2 3900.79,4200.79 4149.21,4200.79 U13.4
OffsetLevel: C14.2 R15.2 U7.3 | length 4874.3
  Top Layer w10: C14.2 U7.3 ; v1(4330,2665) 4540,2665 v1(4545,2670)
  Bottom Layer w10: U7.3 4093.28,2980 4069.14,2955.86 4070,2955 4070,2785 4190,2665 v1(4330,2665) ; v1(4545,2670) 5740,2670 6220,2190 6220,970 6010,760 5685,760 5540,615 R15.2 R15.2@5540,610
Oscilloscope_In: P6.1 U3.5 | length 940
  Bottom Layer w20: U3.5 6350,4215 P6.1
"Other Enable": U2.6 U5.5 U6.6 | length 2557.2
  Top Layer w10: U6.6 5360,3900 5315,3855 5315,3375 U2.6
  Bottom Layer w10: U2.6 5645,3045 6325,3045 6480,3200 6480,3727.25 U5.5
P1.0: P3.4 U1.4 | length 585.5
  Top Layer w10: P3.4 1190,4020 1512.83,3697.17 U1.4
P1.1: P3.5 U1.5 | length 693.6
  Top Layer w10: P3.5 1100,3970 1210,3970 1502.52,3677.48 U1.5
P1.2: P3.6 U1.6 | length 560.4
  Top Layer w10: P3.6 1230,3920 1492.2,3657.8 U1.6
P1.3: P3.7 U1.7 | length 672.5
  Top Layer w10: P3.7 1050,3826.72 1093.28,3870 1250,3870 1481.89,3638.11 U1.7
P1.4: P3.8 U1.8 | length 535.3
  Top Layer w10: P3.8 1270,3820 1471.57,3618.43 U1.8
P1.5: P3.9 U1.9
P1.6: P3.10 U1.10
P1.7: P3.11 U1.11
P2.0: P3.16 U1.16
P2.1: P3.17 U1.17
P2.2: P3.18 U1.18 | length 493.8
  Top Layer w10: P3.18 1345,3320 1446.57,3421.57 U1.18
P2.3: P3.19 U1.19 | length 627.1
  Top Layer w10: P3.19 1100,3270 1330,3270 1461.89,3401.89 U1.19
P2.4: P3.20 U1.20 | length 519
  Top Layer w10: P3.20 1315,3220 1477.2,3382.2 U1.20
P2.5: P3.21 U1.21 | length 658.1
  Top Layer w10: P3.21 1050,3130 1090,3170 1300,3170 1492.52,3362.52 U1.21
P2.6: P3.22 U1.22 | length 544.1
  Top Layer w10: P3.22 1285,3120 1507.83,3342.83 U1.22
P2.7: P3.23 U1.23 | length 680.3
  Top Layer w10: P3.23 1050,3025 1095,3070 1275,3070 1528.15,3323.15 U1.23
P3.1: P4.8 R10.1 U1.33 VertDn1.2 | length 4912.9
  Top Layer w10: P4.8 1605,2770 1801.57,2966.57 U1.33 ; VertDn1.2 4295,510 R10.1
  Bottom Layer w10: P4.8 1650,2720 1650,2500 1965,2185 3330,2185 3865,1650 3865,940 4260.43,544.57 4266.9,544.57 4290,521.47 VertDn1.2
P3.2: P4.9 R9.1 U1.34 VertUp1.2 | length 3988.8
  Top Layer w10: P4.9 1650,2720 1650,2785 1821.26,2956.26 U1.34 ; VertUp1.2 R9.1
  Bottom Layer w10: P4.9 1705,2665 1705,2505 1975,2235 3415,2235 3875,1775 4140,1775 4260.43,1654.57 4266.9,1654.57 4290,1631.47 VertUp1.2
P3.4: P4.11 R14.1 TrigDn1.2 U1.36 | length 5431.6
  Top Layer w10: P4.11 1750,2720 1750,2790 1860.63,2900.63 U1.36 ; TrigDn1.2 R14.1
  Bottom Layer w10: P4.11 1800,2550 2040,2310 4280,2310 4740,1850 4740,1760 5295,1205 5495,1205 5585.43,1114.57 5591.9,1114.57 5615,1091.47 TrigDn1.2
P3.5: P4.12 R13.1 TrigUp1.2 U1.37 | length 5033.9
  Top Layer w10: P4.12 1880,2850 1879.09,2850.91 U1.37@1879.09,3221.77 ; TrigUp1.2 5620,1740 R13.1
  Bottom Layer w10: P4.12 1800,2765 1850,2715 1850,2580 2085,2345 4315,2345 4725,1935 5425,1935 5615,1745 TrigUp1.2
P3.6: *1.25 P4.13 U1.38 | length 2314.1
  Top Layer w10: U1.38 1900,2840 1850,2790 1850,2720 P4.13 2919.96,1650.04 *1.25
P3.7: P4.14 U1.39 | length 460.4
  Top Layer w10: P4.14 1900,2782.97 1920,2802.97 1920,2930.31 1920.91,2931.22 U1.39@1920.91,3221.77
P4.0: P5.6 U1.56 U4.1 | length 2390.3
  Top Layer w10: U1.56 2357.8,3382.2 2613.51,3126.49 2643.51,3126.49 P5.6 ; v1(4225,3405) 4260.47,3440.47 U4.1
  Bottom Layer w10: P5.6 2700,3170 2775,3170 2850,3095 3915,3095 v1(4225,3405)
P4.1: P5.7 U1.57 U4.12 | length 2558.9
  Top Layer w10: U1.57 2383.11,3401.89 2610,3175 2705,3175 P5.7 ; v1(4180,3670) 4245,3670 4260.47,3654.53 U4.12
  Bottom Layer w10: P5.7 2763.27,3220 2777.26,3206.01 2778.99,3206.01 2835,3150 3820,3150 4180,3510 v1(4180,3670)
P4.2: P5.8 U1.58 U4.11 | length 2622.8
  Top Layer w10: U1.58 2408.43,3421.57 2610,3220 P5.8 ; v1(4135,3725) 4140,3730 4245,3730 4280.16,3694.84 U4.11
  Bottom Layer w10: P5.8 2700,3270 2765,3270 2835,3200 3770,3200 4135,3565 v1(4135,3725)
P4.3: P5.9 U1.59 U4.10 | length 2663
  Top Layer w10: U1.59 2438.74,3441.26 2605,3275 2705,3275 P5.9 ; v1(4090,3775) 4260,3775 4299.84,3735.16 U4.10
  Bottom Layer w10: P5.9 2753.67,3316.33 2788.67,3316.33 2855,3250 3720,3250 4090,3620 v1(4090,3775)
P4.4: P5.10 U1.60 U4.9 | length 2734.5
  Top Layer w10: U1.60 2509.06,3460.94 P5.10 ; v1(4040,3825) 4275,3825 4319.53,3780.47 U4.9
  Bottom Layer w10: P5.10 2700,3370 2835,3370 2910,3295 3680,3295 4040,3655 v1(4040,3825)
P4.5: P5.11 U1.61 U4.2 | length 2266
  Top Layer w10: U1.61 2524.37,3480.63 2635,3370 2700,3370 P5.11 2870,3420 2939.84,3350.16 4235.16,3350.16 4280.16,3395.16 U4.2
  Bottom Layer w10: P5.11 P5.11@2750.08,3420.08
P4.6: P5.12 U1.62 | length 485
  Top Layer w10: U1.62 2544.69,3500.31 2616.01,3428.99 2641.01,3428.99 P5.12
P4.7: P5.13 U1.63 | length 589.1
  Top Layer w10: U1.63 2560,3520 2605,3475 2705,3475 P5.13
P5.2: P5.16 U1.66 | length 468.7
  Top Layer w10: U1.66 2574.06,3579.06 2611.33,3616.33 2646.33,3616.33 P5.16
P5.3: P5.17 U1.67 | length 602
  Top Layer w10: U1.67 2553.74,3598.74 2625,3670 2700,3670 P5.17
P5.4: P5.18 U1.68 | length 493.8
  Top Layer w10: U1.68 2548.43,3618.43 P5.18
P5.5: P5.19 U1.69 | length 630
  Top Layer w10: U1.69 2468.11,3638.11 2600,3770 2705,3770 2750,3815 P5.19
P5.6: P5.20 U1.70
P5.7: P5.21 U1.71
P6.4: P1.3 U1.78 | length 745.8
  Top Layer w10: U1.78 2096.85,3871.85 2450,4225 2450,4340 P1.3
P6.5: P1.4 U1.79 | length 608.4
  Top Layer w10: U1.79 2077.17,3882.17 2395,4200 P1.4
P6.6: P1.5 U1.80 | length 13
  Top Layer w10: P1.5@2295,4382.03 P1.5
P6.7: P1.6 U1.81 | length 583.3
  Top Layer w10: U1.81 2037.8,3877.8 2295,4135 P1.6
P7.0: P1.13 U1.88
P7.1: P1.14 U1.89
P7.2: P1.15 U1.90 | length 604
  Top Layer w10: P1.15 1795,4385 1845,4335 1845,4275 1860.63,4259.37 U1.90
P7.3: P1.16 U1.91 | length 495.8
  Top Layer w10: P1.16 1840.94,4249.06 U1.91
P7.4: P4.1 U1.26 | length 787.8
  Top Layer w10: P4.1 1250,2720 1250,2830 1525,3105 1600,3105 1663.78,3168.78 U1.26
P7.5: P4.2 U1.27 | length 610.6
  Top Layer w10: P4.2 1683.46,3153.46 U1.27
P7.6: P4.3 U1.28 | length 718.8
  Top Layer w10: P4.3 1350,2720 1350,2785 1703.15,3138.15 U1.28
P7.7: P4.4 U1.29 | length 585.5
  Top Layer w10: P4.4 1722.83,3092.83 U1.29
P8.0: P4.5 U1.30 | length 693.6
  Top Layer w10: P4.5 1450,2720 1450,2785 1742.52,3077.52 U1.30
P8.1: P4.6 U1.31 | length 560.4
  Top Layer w10: P4.6 1508.99,2778.99 1508.99,2803.99 1762.2,3057.2 U1.31
P8.2: P4.21 U1.46
P8.3: P4.22 U1.47
P8.4: P4.23 U1.48 | length 682.7
  Top Layer w10: U1.48 2096.85,3148.15 2350,2895 2350,2710.86 2390.86,2670 P4.23
P8.5: P4.24 U1.49 | length 573.3
  Top Layer w10: U1.49 2116.54,3153.46 2405,2865 2405,2775 P4.24
P8.6: P4.25 U1.50 | length 702.5
  Top Layer w10: U1.50 2136.22,3168.78 2450,2855 2450,2720 P4.25
P8.7: P5.1 U1.51 | length 840.1
  Top Layer w10: U1.51 2226.77,3283.78 2440.55,3070 2440.55,3009.45 2625,2825 2695,2825 2740,2870 2740,2910 P5.1
P9.0: P5.2 U1.52 | length 610.6
  Top Layer w10: U1.52 2266.54,3303.46 P5.2
P9.1: P5.3 U1.53 | length 714.6
  Top Layer w10: U1.53 2276.85,3323.15 2625,2975 2705,2975 P5.3
P9.2: P5.24 U1.74
P9.3: P5.25 U1.75 | length 708.3
  Top Layer w10: U1.75 2281.22,3756.22 2595,4070 2710,4070 2750,4110 P5.25
P9.4: P1.21 U1.96 | length 682.2
  Top Layer w10: P1.21 1500,4395 1545,4350 1545,4280 1742.52,4082.48 U1.96
P9.5: P1.22 U1.97 | length 571.1
  Top Layer w10: P1.22 1722.83,4067.17 U1.97
P9.6: P1.23 U1.98 | length 704.4
  Top Layer w10: P1.23 1445,4345 1445,4270 1703.15,4011.85 U1.98
P9.7: P1.24 U1.99 | length 596.3
  Top Layer w10: P1.24 1683.46,4006.54 U1.99
P10.5: *1.29 P3.25 U1.25 | length 4120.8
  Top Layer w10: P3.25 1059.39,2929.39 1079.39,2929.39 1125,2975 1255,2975 1563.72,3283.72 1601.71,3283.72 U1.25
  Bottom Layer w10: P3.25 1050,2770 1730,2090 3190,2090 3305,1975 3305,1441.69 *1.29
PJ.0: P4.16 U1.41 | length 468.7
  Top Layer w10: U1.41 1959.06,2855.94 2000,2815 P4.16
PJ.1: P4.17 U1.42 | length 602
  Top Layer w10: U1.42 1978.74,2871.26 2050,2800 2050,2720 P4.17
PJ.2: C20.1 P1.10 U1.85 Y1.2 | length 1530
  Top Layer w10: U1.85 1959.06,4109.06 2095,4245 P1.10
  Bottom Layer w10: P1.10 2145,4245 3067.13,4245 Y1.2@3070,4247.87
PJ.3: C19.2 P1.11 U1.86 Y1.1 | length 1739
  Top Layer w10: U1.86 1939.37,4149.37 2050,4260 2050,4335 1995,4390 P1.11
  Bottom Layer w10: P1.11 2040,4440 2980,4440 Y1.1@3070,4440
PJ.4: P1.17 U1.92 | length 629.1
  Top Layer w10: P1.17 1745,4345 1745,4280 1821.26,4203.74 U1.92
PJ.5: P1.18 U1.93 | length 520.9
  Top Layer w10: P1.18 1801.57,4188.43 U1.93
Power_In: C16.1 J1.1 P18.1 U12.3 | length 1808.3
  Top Layer w20: U12.3 117.07,3345 402.87,3630.81 402.87,3677.87 C16.1 410,4252.93 220,4442.93 J1.1 222.07,4537.03 627.03,4537.03 P18.1
RST_NMI_N: P1.8 U1.83 | length 558.2
  Top Layer w10: U1.83 1998.43,3898.43 2195,4095 P1.8
SWCLKTCK: P1.20 U1.95 | length 546
  Top Layer w10: P1.20 1762.2,4127.8 U1.95
SWDIOTMS: P1.19 U1.94 | length 660
  Top Layer w10: P1.19 1605,4395 1645,4355 1645,4275 1781.89,4138.11 U1.94
VCORE: C4.1 L1.1 P3.12 U1.12 | length 551.3
  Top Layer w10: P3.12 1179.57,3590.43 L1.1 1365.43,3590 1495,3590 1545,3540 1601.46,3540 U1.12
  Bottom Layer w10: C4.1 1485,3600 1500,3585 v2(1505,3585)
VGA_in+: C7.1 U7.1 U7.2 | length 746.4
  Top Layer w20: U7.2 U7.1 4352.75,3180 4425,3252.25 4640,3252.25 4705,3317.25 C7.1
VGA_in-: C6.1 U3.1 U3.2 | length 1261.9
  Top Layer w20: C6.1 4710,4047.25 5077.75,4415 U3.2 U3.1
VGA_Out+: C8.2 L2.1 U4.14 | length 673.5
  Top Layer w10: L2.1 3875,3845 4170.47,3549.53 U4.14@4215,3549.53
  Top Layer w20: C8.2 3746.3,3926.82 L2.1
VGA_Out-: C11.2 L3.1 U4.15 | length 513.4
  Top Layer w10: L3.1@3827.91,3530.16 4160,3530.16 4160.31,3530.47 U4.15@4215,3530.47
  Top Layer w20: C11.2 3706.5,3518.31 L3.1 ; L3.1@3820,3522.25 L3.1@3827.91,3530.16
VSW: L1.2 P3.14 U1.14 | length 459.9
  Top Layer w10: P3.14 1364.57,3520 L1.2 1383.62,3500.94 1479.66,3500.94 1480.29,3500.31 U1.14
pads on no net: *1.1 *1.12 *1.14 *1.18 *1.23 *1.24 *1.30 *1.40 HrzDn1.3 HrzDn1.4 HrzUp1.3 HrzUp1.4 J1.3 P1.26 P3.26 P4.26 P5.26 P6.2 P6.3 P18.2 R15. TrigDn1.3 TrigDn1.4 TrigUp1.3 TrigUp1.4 U4.4 U4.13 U4.16 U5.3 U7.5 U7.6 U7.7 U13.1 U13.6 U13.7 VertDn1.3 VertDn1.4 VertUp1.3 VertUp1.4

## Polygon pours and split planes (outlines as drawn)
AVSS1 on Bottom Layer "AVSS1_L02_P002" (solid, pour order 2): 0,4640 6790,4640 6790,0 6789.73,0.27 -0.42,0.27
AVSS1 on Top Layer "AVSS1_L01_P003" (solid, pour order 3): 0,4640 6790,4640 6790,0 0,0

## Keep-outs
Top Layer:
  the board outline again, w10

## Silkscreen, mask and mechanical layers (free items; w line width, h text height)
Top Overlay:
  text "Juan Ospina" at 6090,154.99 h60
  text "Juanderful Oscope" at 65,60 h60
  text "UF Fall 2020" at 6050,50 h60
Mechanical 1:
  the board outline again, w10

## Text inside footprints (layer, text, board x,y; h text height)
U2: Top Overlay "*" at 6095.5,3137.5 h50 r270; Mechanical 13 "*" at 6095.5,3137.5 h50 r270
U3: Top Overlay "*" at 5592.5,4547 h50; Mechanical 13 "*" at 5592.5,4547 h50
U4: Top Overlay "*" at 4260.63,3415.5 h50 r90; Mechanical 13 "*" at 4260.63,3415.5 h50 r90
U5: Top Overlay "*" at 6412.5,3376.75 h50 r180; Mechanical 13 "*" at 6412.5,3376.75 h50 r180
U6: Top Overlay "*" at 5372.5,3376.75 h50 r180; Mechanical 13 "*" at 5372.5,3376.75 h50 r180
U7: Top Overlay "*" at 4137.5,3212 h50; Mechanical 13 "*" at 4137.5,3212 h50; Mechanical 7 "Pin 1 Padstyle: SX54Y54D34P" at 3962.5,2503 h50; Mechanical 7 "Default Padstyle: EX54Y54D34P" at 3937.5,2603 h50
U12: Mechanical 7 "Default Padstyle: OX65Y65D45P" at 467.5,2882.5 h50 r90; Mechanical 7 "Pin 1 Padstyle: OX65Y65D0T" at 567.5,2920 h50 r90; Mechanical 7 "0in/0mm" at 152.5,3515 h25 r90
U13: Top Overlay "*" at 4137.5,4535 h50; Mechanical 13 "*" at 4142.5,4475 h50; Mechanical 7 "Default Padstyle: EX60Y60D40P" at 3937.5,3920 h50; Mechanical 7 "Pin 1 Padstyle: SX60Y60D40P" at 3962.5,3820 h50; Mechanical 7 "Alt 1 Padstyle: OX60Y90D30P" at 3962.5,3770 h50; Mechanical 7 "Alt 2 Padstyle: OX90Y60D30P" at 3962.5,3720 h50; Mechanical 7 "0.1in/2.54mm" at 3880,4437.5 h25; Mechanical 7 "0.3in/7.62mm" at 4225,4055 h25; Mechanical 7 "0.31in/7.874mm" at 4212.5,4620 h25; Mechanical 7 "0.39in/9.906mm" at 4570,4337.5 h25